# Altium PCB RaspberryHatBoard.PcbDoc
Units mm, origin at the board's own origin, x right, y up, seen from the top; angles counter-clockwise.
Board outline 65 x 56 mm, 2 copper layers (Top Layer, Bottom Layer); 1 components, 45 nets, 44 pads, 0 vias.
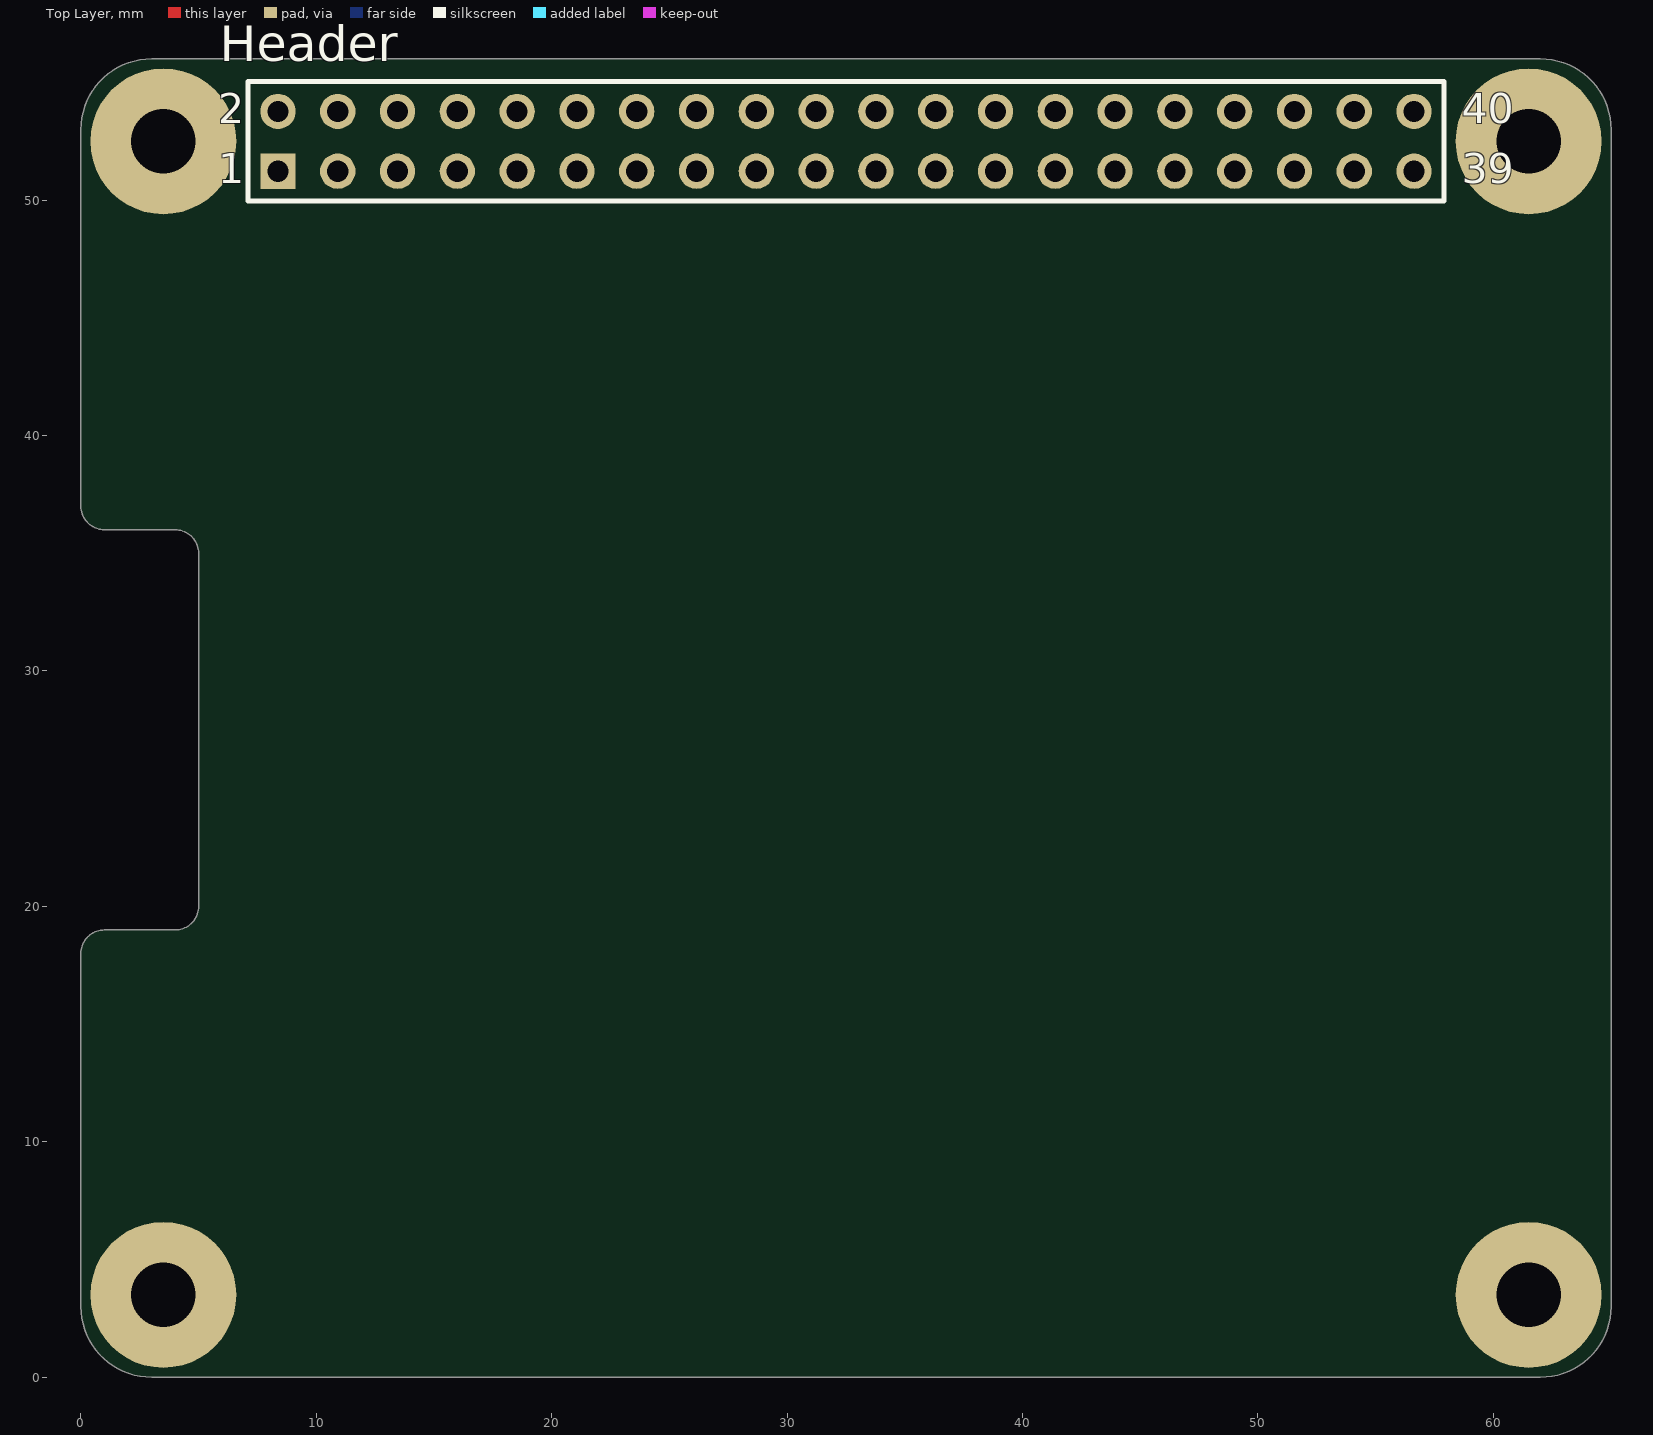
[diagram p0: Top Layer view]
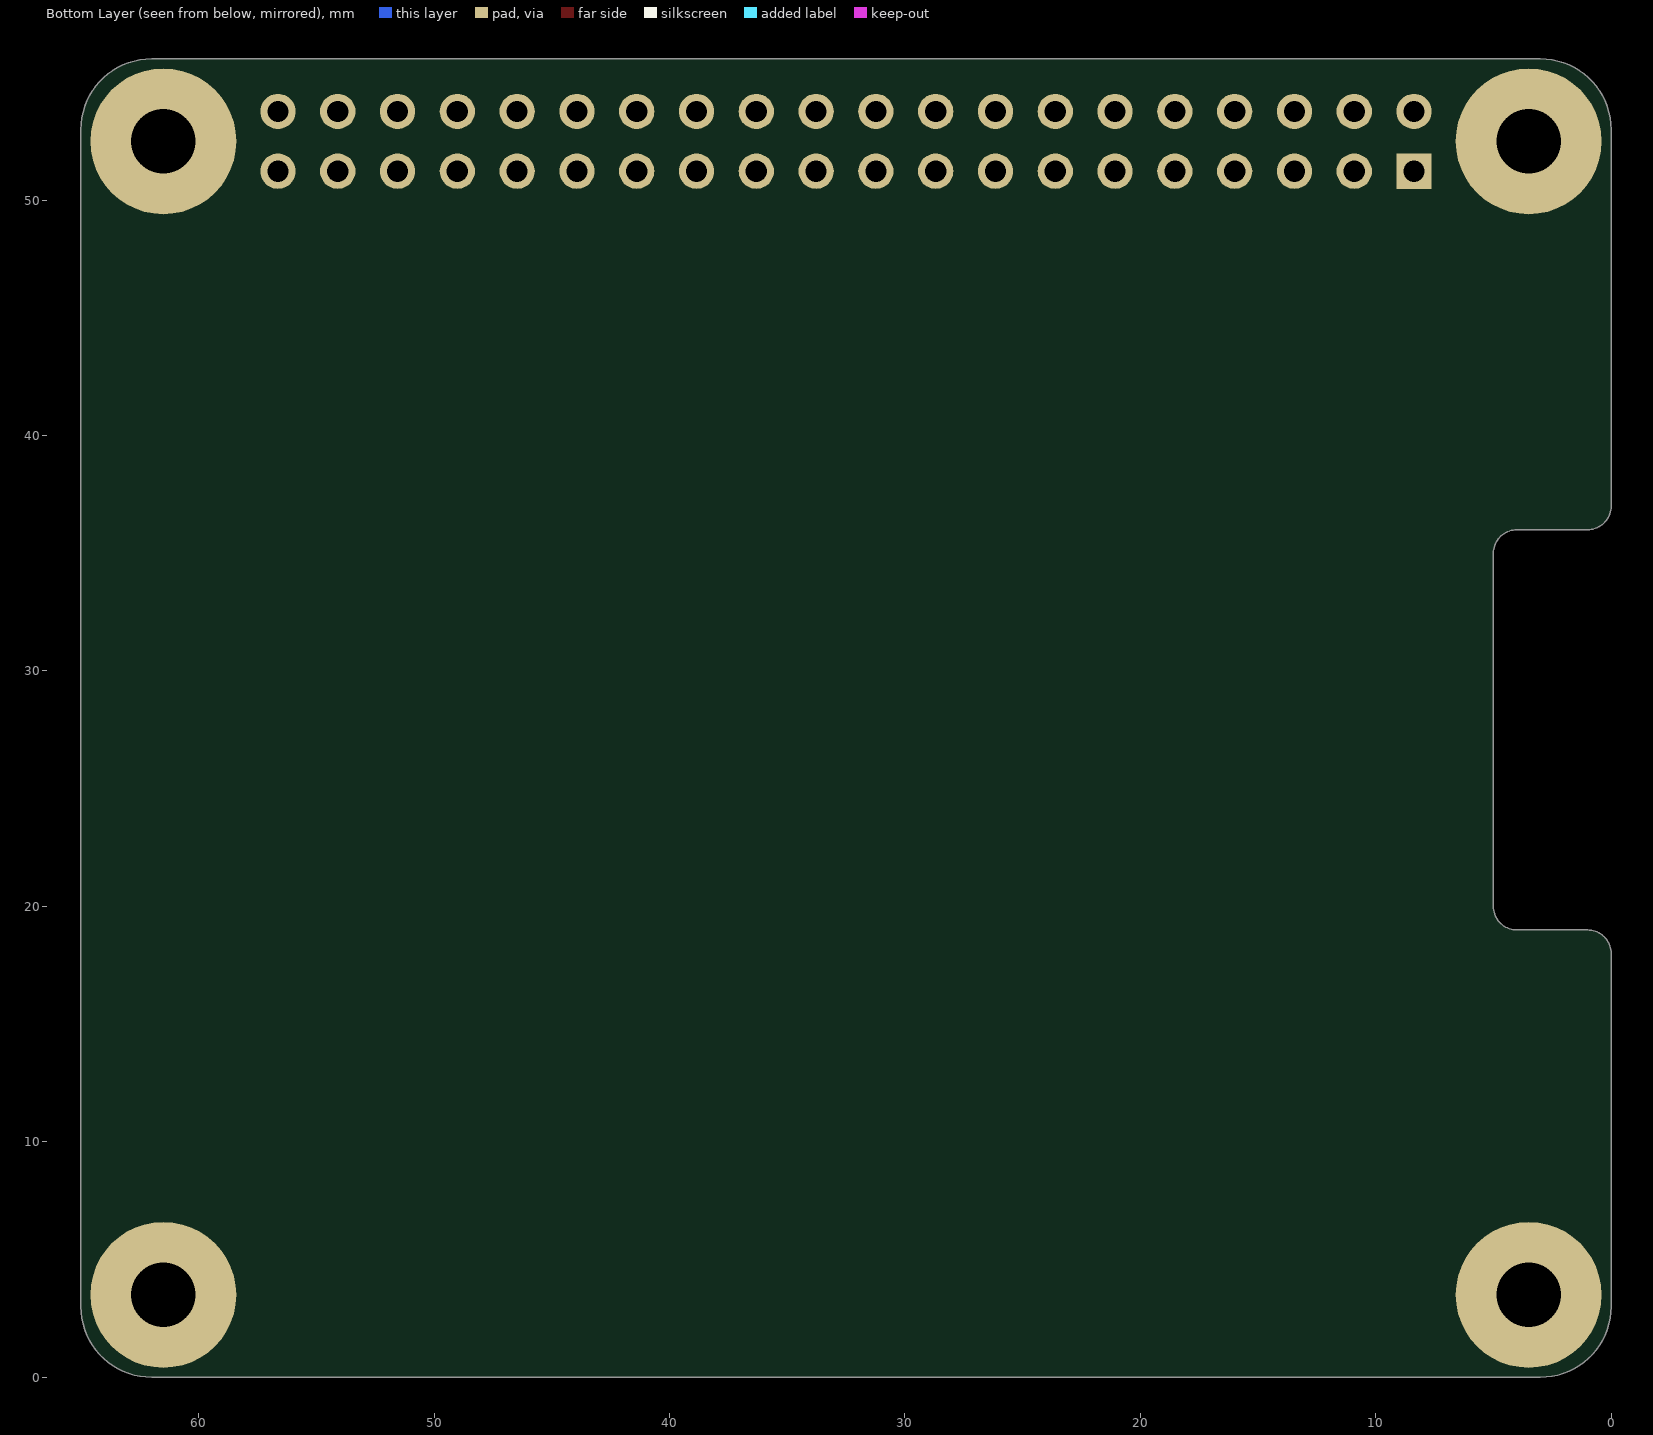
[diagram p1: Bottom Layer view, seen from below]

## Layer stack, top to bottom
Top Solder: solder mask 0.0102, Solder Resist, Dk 3.5
Top Layer: signal copper 0.0356
Dielectric 1: dielectric 0.32, FR-4, Dk 4.8
Bottom Layer: signal copper 0.0356
Bottom Solder: solder mask 0.0102, Solder Resist, Dk 3.5

## Board outline
0,3 0,18 cw(c1,18) 1,19 4,19 ccw(c4,20) 5,20 5,35 ccw(c4,35) 4,36 1,36 cw(c1,37) 0,37 0,53 cw(c3,53) 3,56 62,56 cw(c62,53) 65,53 65,3 cw(c62,3) 62,0 3,0 cw(c3,3)

## Design rules (kind name [scope] priority, off if disabled: settings)
Clearance [All] p1: gap=0.254 ignorepadtopadclearanceinfootprint=FALSE except(0: Arc-Hole Track-Hole SMDPad-Hole THPad-Hole Via-Hole Fill-Hole Poly-Hole Region-Hole Text-Hole)
PolygonConnect [All] p1: connectstyle=Relief reliefconductorwidth=0.254 reliefentries=4 polygonreliefangle="90 Angle" airgapwidth=0.254
RoutingVias [All] p1: holewidth=0.711 width=1.27 viastyle="Through Hole" minholewidth=0.711 minwidth=1.27 maxholewidth=0.711 maxwidth=1.27
SolderMaskExpansion [All] p1: expansion=0.102 istentingtop=FALSE
Width [All] p1: maxlimit=0.254 minlimit=0.254 preferedwidth=0.254
30 further rules are at their usual default settings.

## Components (designator, comment, footprint, x,y, rotation, side; value= is the part's Value field where it differs from the comment)
Header "Comment" HDR2X20 8.37,51.23 r0 top

## Footprints (in the part's own frame and the unit in brackets; to place one, negate y for a bottom-side part, rotate by r counter-clockwise, add the part's x,y. Pads: shape width x height; smd on the part's side, far side on the other; paste and mask are expansions set on the pad)
HDR2X20 [mm] "Connector; Header; 20x2 Position"
  rect 1.5x1.5 hole 0.9: 1(0,0)
  round 1.5 hole 0.9: 2(0,2.54) 3(2.54,0) 4(2.54,2.54) 5(5.08,0) 6(5.08,2.54) 7(7.62,0) 8(7.62,2.54) 9(10.16,0) 10(10.16,2.54) 11(12.7,0) 12(12.7,2.54) 13(15.24,0) 14(15.24,2.54) 15(17.78,0) 16(17.78,2.54) 17(20.32,0) 18(20.32,2.54) 19(22.86,0) 20(22.86,2.54) 21(25.4,0) 22(25.4,2.54) 23(27.94,0) 24(27.94,2.54) 25(30.48,0) 26(30.48,2.54) 27(33.02,0) 28(33.02,2.54) 29(35.56,0) 30(35.56,2.54) 31(38.1,0) 32(38.1,2.54) 33(40.64,0) 34(40.64,2.54) 35(43.18,0) 36(43.18,2.54) 37(45.72,0) 38(45.72,2.54) 39(48.26,0) 40(48.26,2.54)
  silkscreen extent -1.27,-1.27 49.53,3.81

## Free pads (board coordinates)
  round 6.2 hole 2.75 unplated: 0(3.5,3.5) 0(3.5,52.5) 0(61.5,3.5) 0(61.5,52.5)

## Nets (pads, with @x,y where several pads share a name; then routed paths per layer and width w, separated by ;. In a path a pad name is that pad's centre, name@x,y a point inside that pad or via, vN(x,y) a via of type N, cw(c..) or ccw(c..) an arc to the next point about the centre after c; other vN are vias at no path point)
"FROM BOILER": 
"FROM THERM": 
GND: 
MISO: 
MOSI: 
NetC3_1: 
NetC4_1: 
NetD1_A: 
NetD1_C: 
NetD2_A: 
NetD3_A: 
NetD5_1: 
NetD6_1: 
NetD7_1: 
NetJ1_2: 
NetJ1_4: 
NetJ1_6: 
NetJ1_8: 
NetK2_1: 
NetLed1_1: 
NetLed2_1: 
NetLed3_1: 
NetLed4_1: 
NetQ2_B: 
NetQ3_B: 
NetQ3_C: 
NetQ4_E: 
NetQ5_B: 
NetQ5_C: 
NetR4_1: 
NetR5_2: 
NetR7_2: 
NetR12_1: 
NetR14_1: 
NetR16_1: 
NetR18_1: 
RESET: 
RXD: 
SCK: 
"TO BOILER": 
"TO THERM": 
TXD: 
VCC3V3: 
VCC5V: 
VCC24V: 
pads on no net: Header.1 Header.2 Header.3 Header.4 Header.5 Header.6 Header.7 Header.8 Header.9 Header.10 Header.11 Header.12 Header.13 Header.14 Header.15 Header.16 Header.17 Header.18 Header.19 Header.20 Header.21 Header.22 Header.23 Header.24 Header.25 Header.26 Header.27 Header.28 Header.29 Header.30 Header.31 Header.32 Header.33 Header.34 Header.35 Header.36 Header.37 Header.38 Header.39 Header.40

## Silkscreen, mask and mechanical layers (free items; w line width, h text height)
Mechanical 1:
  lines w0.127: 7.87,50.73 8.87,51.73 ; 7.87,51.73 8.87,50.73 ; 32,52 33,53 ; 32,53 33,52 ; 0,3 ccw(c3,3) 3,0 62,0 ccw(c62,3) 65,3 65,53 ccw(c62,53) 62,56 3,56 ccw(c3,53) 0,53 0,37 ccw(c1,37) 1,36 4,36 cw(c4,35) 5,35 5,20 cw(c4,20) 4,19 1,19 ccw(c1,18) 0,18 0,3
Route Tool Path:
  lines w2: 45,4 45,19
Docu:
  text "Connector alligment / Center 40p connector" at 27.5,48.5 h0.58
  text "Connector alligment / Pin1" at 8,46.5 h0.58
  text "Camera flex slot / Milling layer10" at 34,11.5 h0.58

## Dimensions
0,53 to 65,53 on Docu
62,56 to 62,0 on Docu
3,53 to 1,64 on Docu
5,35 to 0,30 on Docu
4,36 to 4,19 on Docu
4,36 to 3,56 on Docu
1,18 to 1,18 on Docu
0,18 to 45,4 on Docu
0,3 to 3.5,3.5 on Docu
3,0 to 3.5,3.5 on Docu

## Text inside footprints (layer, text, board x,y; h text height)
Header: Top Overlay "39" at 58.662,50.722 h1.27; Top Overlay "40" at 58.662,53.262 h1.27; Top Overlay "2" at 5.83,53.262 h1.27; Top Overlay "1" at 5.83,50.722 h1.27